# Altium PCB VOLTAGE_PEAK_V3.PcbDoc
Units mil, origin at the board's own origin, x right, y up, seen from the top; angles counter-clockwise.
Board outline 1060.03 x 1010.03 mil, 2 copper layers (Top Layer, Bottom Layer); 23 components, 13 nets, 73 pads, 0 vias.
Unrouted connection lines stored in the file: 1.
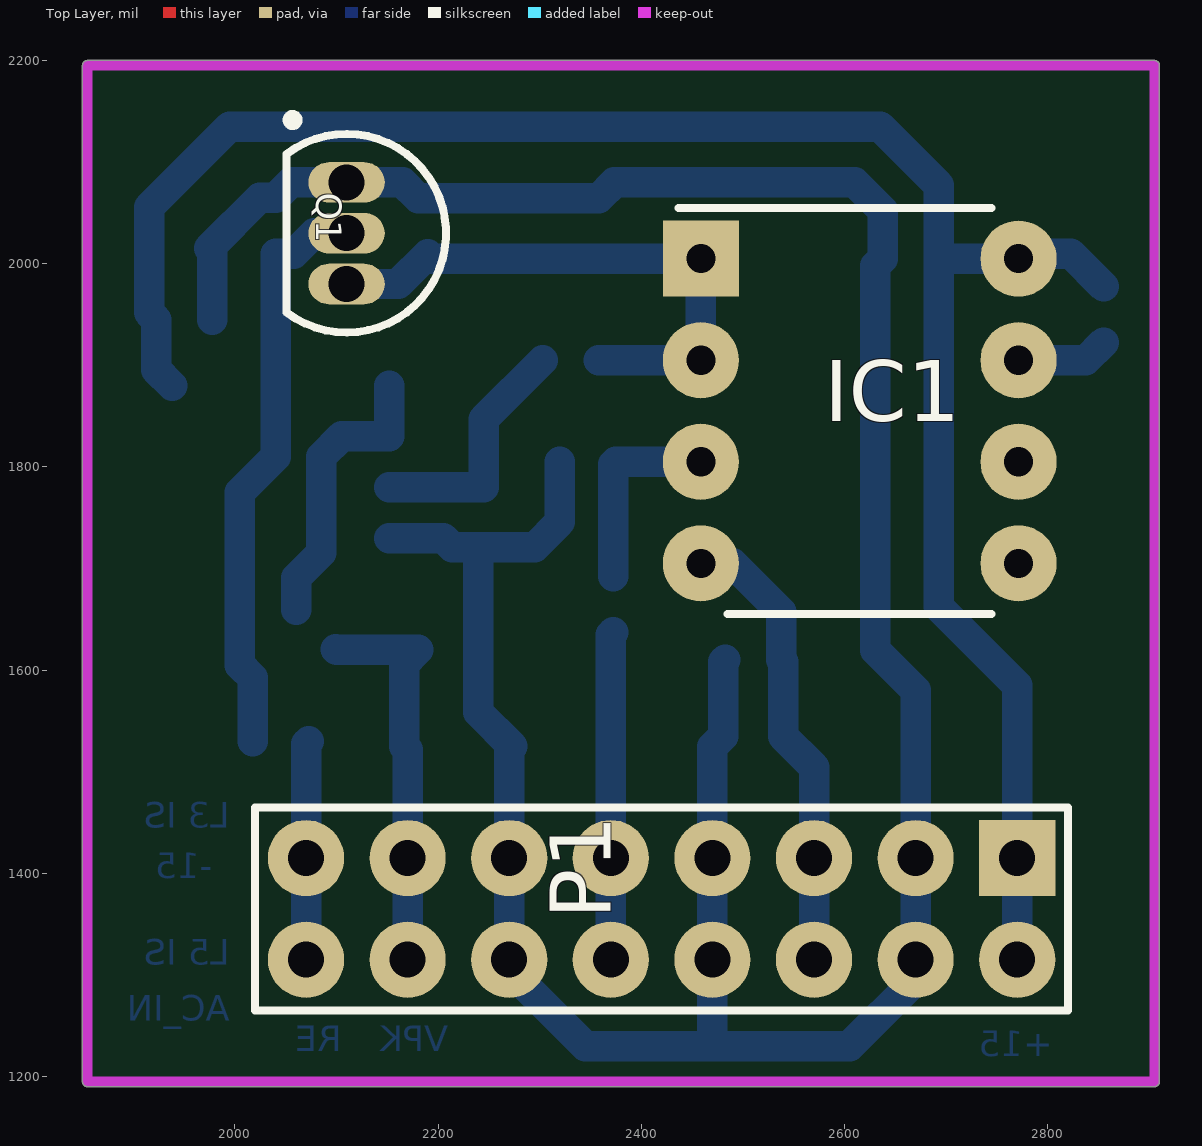
[diagram p0: Top Layer view]
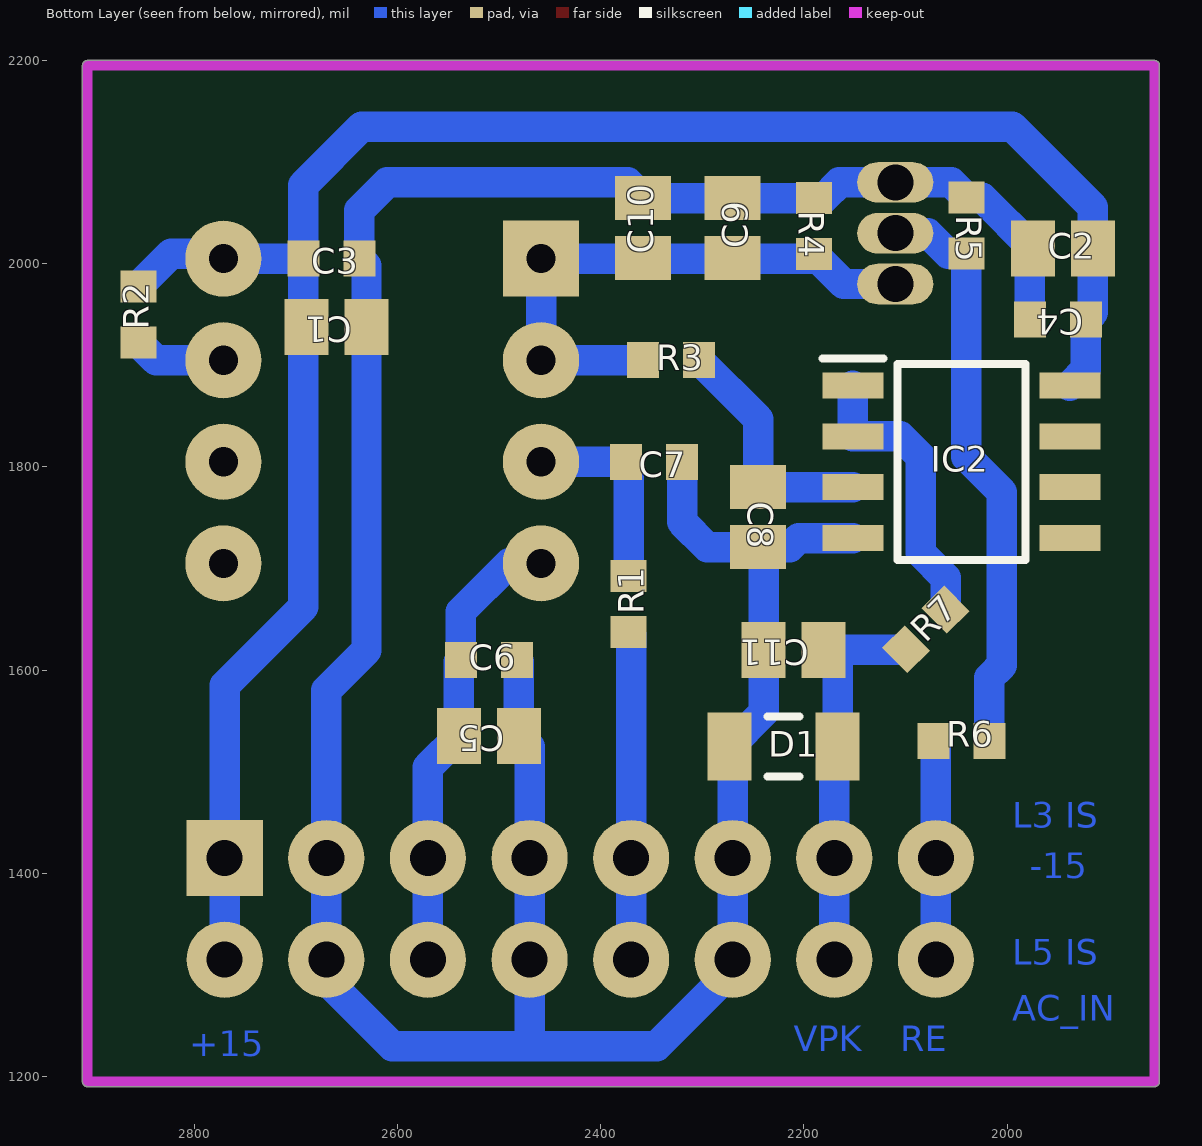
[diagram p1: Bottom Layer view, seen from below]

## Layer stack, top to bottom
Top Solder: solder mask 0.4, Solder Resist, Dk 3.5
Top Layer: signal copper 1.4
Dielectric 1: dielectric 12.6, FR-4, Dk 4.8
Bottom Layer: signal copper 1.4
Bottom Solder: solder mask 0.4, Solder Resist, Dk 3.5

## Board outline
2910.01,1195 cw(c2905,1195) 2905,1189.98 1855,1189.98 cw(c1855,1195) 1849.98,1195 1849.98,2195 cw(c1855,2195) 1855,2200.01 2905,2200.01 cw(c2905,2195) 2910.01,2195

## Design rules (kind name [scope] priority, off if disabled: settings)
Clearance [All] p1: gap=5 ignorepadtopadclearanceinfootprint=FALSE except(0: Arc-Hole Track-Hole SMDPad-Hole THPad-Hole Via-Hole Fill-Hole Poly-Hole Region-Hole Text-Hole; 10: Arc-Text Track-Text SMDPad-Text THPad-Text Via-Text Fill-Text Poly-Text Region-Text Text-Text)
PolygonConnect [All] p1: connectstyle=Relief reliefconductorwidth=10 reliefentries=4 polygonreliefangle="90 Angle" airgapwidth=10
RoutingVias [All] p1: holewidth=28 width=50 viastyle="Through Hole" minholewidth=28 minwidth=50 maxholewidth=28 maxwidth=50
SolderMaskExpansion [All] p1: expansion=4
Width [All] p1: maxlimit=30 minlimit=10 preferedwidth=30 minimp=50.000000 maximp=50.000000 favimp=50.000000
30 further rules are at their usual default settings.

## Classes and differential pairs
component class task4_fullPP: C1 C2 C3 C4 C5 C6 C7 C8 C9 C10 D1 IC1 IC2 Q1 R1 R2 R3 R4 R5 R6

## Components (designator, comment, footprint, x,y, rotation, side; value= is the part's Value field where it differs from the comment)
C1 "Cap" C0805 2660,1937.56 r0 bottom value=10uF
C2 "Cap" C0805 1945,2015 r180 bottom value=10uF
C3 "Cap" 1608[0603] 2665,2005 r180 bottom value=10nF
C4 "Cap" 1608[0603] 1950,1945 r0 bottom value=10nF
C5 "Cap" C0805 2510,1535 r0 bottom value=10uF
C6 "Cap" 1608[0603] 2510,1610 r180 bottom value=10nF
C7 "Cap" 1608[0603] 2347.44,1805 r180 bottom value=4.7nF
C8 "Cap" C0805 2245,1750.47 r270 bottom value=1uF
C9 "Cap" C0805 2270,2035 r90 bottom value=2.2uF
C10 "Cap" C0805 2358.07,2035 r90 bottom value=2.2uF
C11 "Cap" C0805 2210,1620 r0 bottom value=10uF
D1 "D Zener" C1206 2220,1524.88 r180 bottom
IC1 "LM311P" DIP794W53P254L959H508Q8N 2615,1855 r0 top
IC2 "OPA2188AID" SOIC127P600X175-8N 2045,1805 r180 bottom
P1 "Header 8X2" HDR2X8 2770,1415 r180 top
Q1 "2N3904" TO-92A 2110,2030 r180 top
R1 "Res2" 1608[0603] 2372.56,1665 r90 bottom value=10k
R2 "Res2" 1608[0603] 2855,1950 r90 bottom value=4.7k
R3 "Res2" 1608[0603] 2330.51,1905 r180 bottom value=1k
R4 "Res2" 1608[0603] 2190,2036.97 r270 bottom value=1M
R5 "Res2" 1608[0603] 2040,2037.44 r270 bottom value=330k
R6 "Res2" 1608[0603] 2045,1530 r180 bottom value=2k
R7 "Res2" 1608[0603] 2080,1640 r135 bottom value=1K

## Footprints (in the part's own frame and the unit in brackets; to place one, negate y for a bottom-side part, rotate by r counter-clockwise, add the part's x,y. Pads: shape width x height; smd on the part's side, far side on the other; paste and mask are expansions set on the pad)
1608[0603] [mm] "Chip Capacitor, Body 1.6x0.8mm, IPC High Density"
  rect 0.8x0.9 smd: 1(-0.7,0) 2(0.7,0)
  body extent -0.87,-0.48 0.87,0.48, height 1.3
C0805 [mm] "Chip Capacitor, Body 2.0x1.3mm, IPC High Density"
  rect 1.1x1.4 smd: 1(-0.75,0) 2(0.75,0)
  body extent -1.1,-0.73 1.1,0.72, height 1.4
C1206 [mm] "Chip Capacitor, Body 3.2x1.6mm, IPC High Density"
  rect 1.1x1.7 smd: 1(-1.35,0) 2(1.35,0)
  silkscreen extent -0.4,-0.75 0.4,0.75, body extent -1.7,-0.9 1.7,0.9, height 1.3
DIP794W53P254L959H508Q8N [mm]
  rect 1.905x1.905 hole 0.73: 1(-3.97,3.81)
  round 1.905 hole 0.73: 2(-3.97,1.27) 3(-3.97,-1.27) 4(-3.97,-3.81) 5(3.97,-3.81) 6(3.97,-1.27) 7(3.97,1.27) 8(3.97,3.81)
  silkscreen extent -4.53,-5.08 3.3,5.08, body extent -4.1,-4.79 4.1,4.79, height 5.08
HDR2X8 [mm] "Connector; Header; 8x2 Position"
  rect 1.905x1.905 hole 0.9: 1(0,0)
  round 1.905 hole 0.9: 2(0,2.54) 3(2.54,0) 4(2.54,2.54) 5(5.08,0) 6(5.08,2.54) 7(7.62,0) 8(7.62,2.54) 9(10.16,0) 10(10.16,2.54) 11(12.7,0) 12(12.7,2.54) 13(15.24,0) 14(15.24,2.54) 15(17.78,0) 16(17.78,2.54)
  silkscreen extent -1.27,-1.27 19.05,3.81
SOIC127P600X175-8N [mm]
  rect 1.525x0.65 smd: 1(-2.712,1.905) 2(-2.712,0.635) 3(-2.712,-0.635) 4(-2.712,-1.905) 5(2.712,-1.905) 6(2.712,-0.635) 7(2.712,0.635) 8(2.712,1.905)
  silkscreen extent -3.47,-2.45 1.6,2.58, body extent -3,-2.45 3,2.45, height 1.75
TO-92A [mil] "TO, Flat Index; 3 In-Line, Axial Leads; Body Dia. 4.5mm; Leads 0.51 x 0.48 mm (max)"
  oval 75x40 hole 35.43: 1(0,-50) 2(0,0) 3(0,50)
  silkscreen extent -98,-116 59,98, body extent -98,-98 59,98, height 270

## Part data
C1 C2 C3 C4 C5 C6 C7 C8 C9 C10 C11: "Capacitor", LatestRevisionDate=17-Jul-2002, LatestRevisionNote="Re-released for DXP Platform.", PackageDescription="Radial Cap, Thru-Hole; 2 Leads; 0.3 in Pin Spacing", PackageReference=RAD-0.3, Published=8-Jun-2000, Publisher="Altium Limited"
D1: "Zener Diode", LatestRevisionDate=17-Jul-2002, LatestRevisionNote="Re-released for DXP Platform.", PackageDescription="Diode, Thru-Hole; 2 Leads; 0.7 in Pin Spacing", PackageReference=DIODE-0.7, Published=8-Jun-2000, Publisher="Altium Limited"
IC1: "Integrated Circuit", Manufacturer_Name="Texas Instruments", Mouser Part Number=595-LM311P, RS Part Number=1218305, Datasheet Link=http://www.ti.com/lit/ds/symlink/lm311.pdf, Height=5.08mm, Manufacturer_Part_Number=LM311P, Mouser Price/Stock=https://www.mouser.com/Search/Refine.aspx?Keyword=595-LM311P, RS Price/Stock=https://uk.rs-online.com/web/p/products/1218305
IC2: "Integrated Circuit", Manufacturer_Name="Texas Instruments", Mouser Part Number=595-OPA2188AID, RS Part Number=9212845, Datasheet Link=http://www.ti.com/lit/ds/symlink/opa2188.pdf, Height=1.75mm, Manufacturer_Part_Number=OPA2188AID, Mouser Price/Stock=https://www.mouser.com/Search/Refine.aspx?Keyword=595-OPA2188AID, RS Price/Stock=https://uk.rs-online.com/web/p/products/9212845
P1: "Header, 8-Pin, Dual row", LatestRevisionDate=17-Jul-2002, LatestRevisionNote="Re-released for DXP Platform.", Publisher="Altium Limited"
Q1: "NPN General Purpose Amplifier", ComponentLink1Description="Manufacturer Link", ComponentLink1URL=http://www.fairchildsemi.com/, ComponentLink2Description=Datasheet, ComponentLink2URL=http://www.fairchildsemi.com/ds/2N%2F2N3904.pdf, DatasheetVersion=1997, LatestRevisionDate=15-Jan-2003, LatestRevisionNote="PCB Footprint 'BCY-W3/D4.7' replaced", PackageDescription="TO, Flat Index; 3 In-Line, Axial Leads; Body Dia. 4.5mm; Leads 0.51 x 0.48 mm (max)", PackageReference=TO-92A, PackageVersion=Sep-1998, Published=8-Jun-2000, Publisher="Altium Limited"
R1 R2 R3 R4 R5 R6 R7: "Resistor", LatestRevisionDate=17-Jul-2002, LatestRevisionNote="Re-released for DXP Platform.", PackageDescription="Axial Device, Thru-Hole; 2 Leads; 0.4 in Pin Spacing", PackageReference=AXIAL-0.4, Published=8-Jun-2000, Publisher="Altium Limited"

## Nets (pads, with @x,y where several pads share a name; then routed paths per layer and width w, separated by ;. In a path a pad name is that pad's centre, name@x,y a point inside that pad or via, vN(x,y) a via of type N, cw(c..) or ccw(c..) an arc to the next point about the centre after c; other vN are vias at no path point)
+15: C1.2 C2.2 C3.1 C4.1 IC1.8 IC2.8 P1.1 P1.2 R2.2 | length 1991.2
  Bottom Layer w30: IC2.8 1922.44,1895.79 C4.1 1915.47,1951.97 C2.2 1915.47,2055.47 1995,2135 2635,2135 2692.56,2077.44 C3.1 ; P1.2 P1.1 2770,1584.88 2692.56,1662.32 C3.1 ; R2.2 2822.56,2010 2776.3,2010 IC1.8 C3.1
-15: C5.2 C6.1 IC1.4 P1.5 P1.6 | length 454.4
  Bottom Layer w30: IC1.4 2490,1705 2537.56,1657.44 C6.1 2539.53,1608.03 C5.2 2570,1504.53 P1.5 P1.6
AC_IN: P1.9 P1.10 R1.1 | length 323.5
  Bottom Layer w30: P1.10 P1.9 2370,1634.88 R1.1
GND: C1.1 C2.1 C3.2 C4.2 C5.1 C6.2 C7.2 C8.2 C9.2 C10.2 C11.2 D1.1 IC2.4 P1.3 P1.4 P1.7 P1.8 P1.11 P1.12 Q1.1 R4.1 R5.1 | length 3080.1
  Bottom Layer w30: C4.2 1977.56,2011.97 C2.1 2024.53,2065 R5.1 2055,2080 2165,2080 2180.47,2064.53 R4.1 C9.2 C10.2 2373.54,2080 2610,2080 2637.44,2052.56 C3.2 2630.47,1998.03 C1.1 2630.47,1619.53 2670,1580 P1.3 P1.4 2670,1295 2605,1230 2470,1230 ; IC2.4 2205,1730 2214.06,1720.94 C8.2 ; C7.2 2319.88,1745.83 2295,1720.94 C8.2 ; C6.2 2480.47,1608.03 C5.1 2470,1524.53 P1.7 P1.8 2470,1230 ; C8.2 2239.53,1715.47 C11.2 2239.53,1558.5 D1.1 2270,1521.73 P1.11 P1.12 2270,1304.88 2344.88,1230 2470,1230
NetC7_1: C7.1 IC1.3 R1.2 | length 197.2
  Bottom Layer w30: R1.2 2372.56,1802.56 C7.1 IC1.3
NetC8_1: C8.1 IC2.3 R3.2 | length 242.2
  Bottom Layer w30: IC2.3 C8.1 2245,1847.05 R3.2
NetC9_1: C9.1 C10.1 IC1.1 IC1.2 Q1.3 R3.1 R4.2 | length 563.3
  Bottom Layer w30: Q1.3 2160.59,1980 R4.2 2194.41,2005 IC1.1 IC1.2 R3.1
NetIC1_5: IC1.5 IC1.6
NetIC1_7: IC1.7 R2.1 | length 90.9
  Bottom Layer w30: IC1.7 2837.56,1905 R2.1
NetIC2_1: IC2.1 IC2.2 R7.2 | length 285.7
  Bottom Layer w30: R7.2 2060.51,1690.99 2085,1715.47 2085,1810 2105,1830 IC2.2 IC2.1
NetQ1_2: Q1.2 R5.2 R6.2 | length 577.9
  Bottom Layer w30: R6.2 2017.44,1592.56 2005,1605 2005,1775 2040,1810 R5.2 2057.91,2009.88 2078.03,2030 Q1.2
RE: P1.15 P1.16 R6.1 | length 216.1
  Bottom Layer w30: P1.16 P1.15 2070,1527.44 R6.1
VPeak: C11.1 D1.2 P1.13 P1.14 R7.1 | length 393.1
  Bottom Layer w30: R7.1 2100,1620 C11.1 2166.85,1606.38 D1.2 2170,1521.73 P1.13 P1.14
pads on no net: IC2.5 IC2.6 IC2.7

## Polygon pours and split planes (outlines as drawn)
GND on Bottom Layer "Top Layer-GND" (solid, remove dead copper, pour order 2): 2905,2195

## Keep-outs
Keep-Out Layer:
  lines w10: 1855,1195 2905,1195 2905,2195 1855,2195 1855,1195

## Other copper
Bottom Layer:
  text "L3 IS" at 1995,1445 h25
  text "-15" at 1977.56,1395 h25
  text "L5 IS" at 1995,1310 h25
  text "AC_IN" at 1995,1255 h25
  text "RE" at 2105,1225 h25
  text "VPK" at 2210,1225 h25
  text "+15" at 2805,1220 h25